# Altium PCB PCB2.PcbDoc
Units mm, origin at the board's own origin, x right, y up, seen from the top; angles counter-clockwise.
Board outline 73.79 x 93.34 mm, 2 copper layers (Top Layer, Bottom Layer); 58 components, 45 nets, 226 pads, 48 vias.
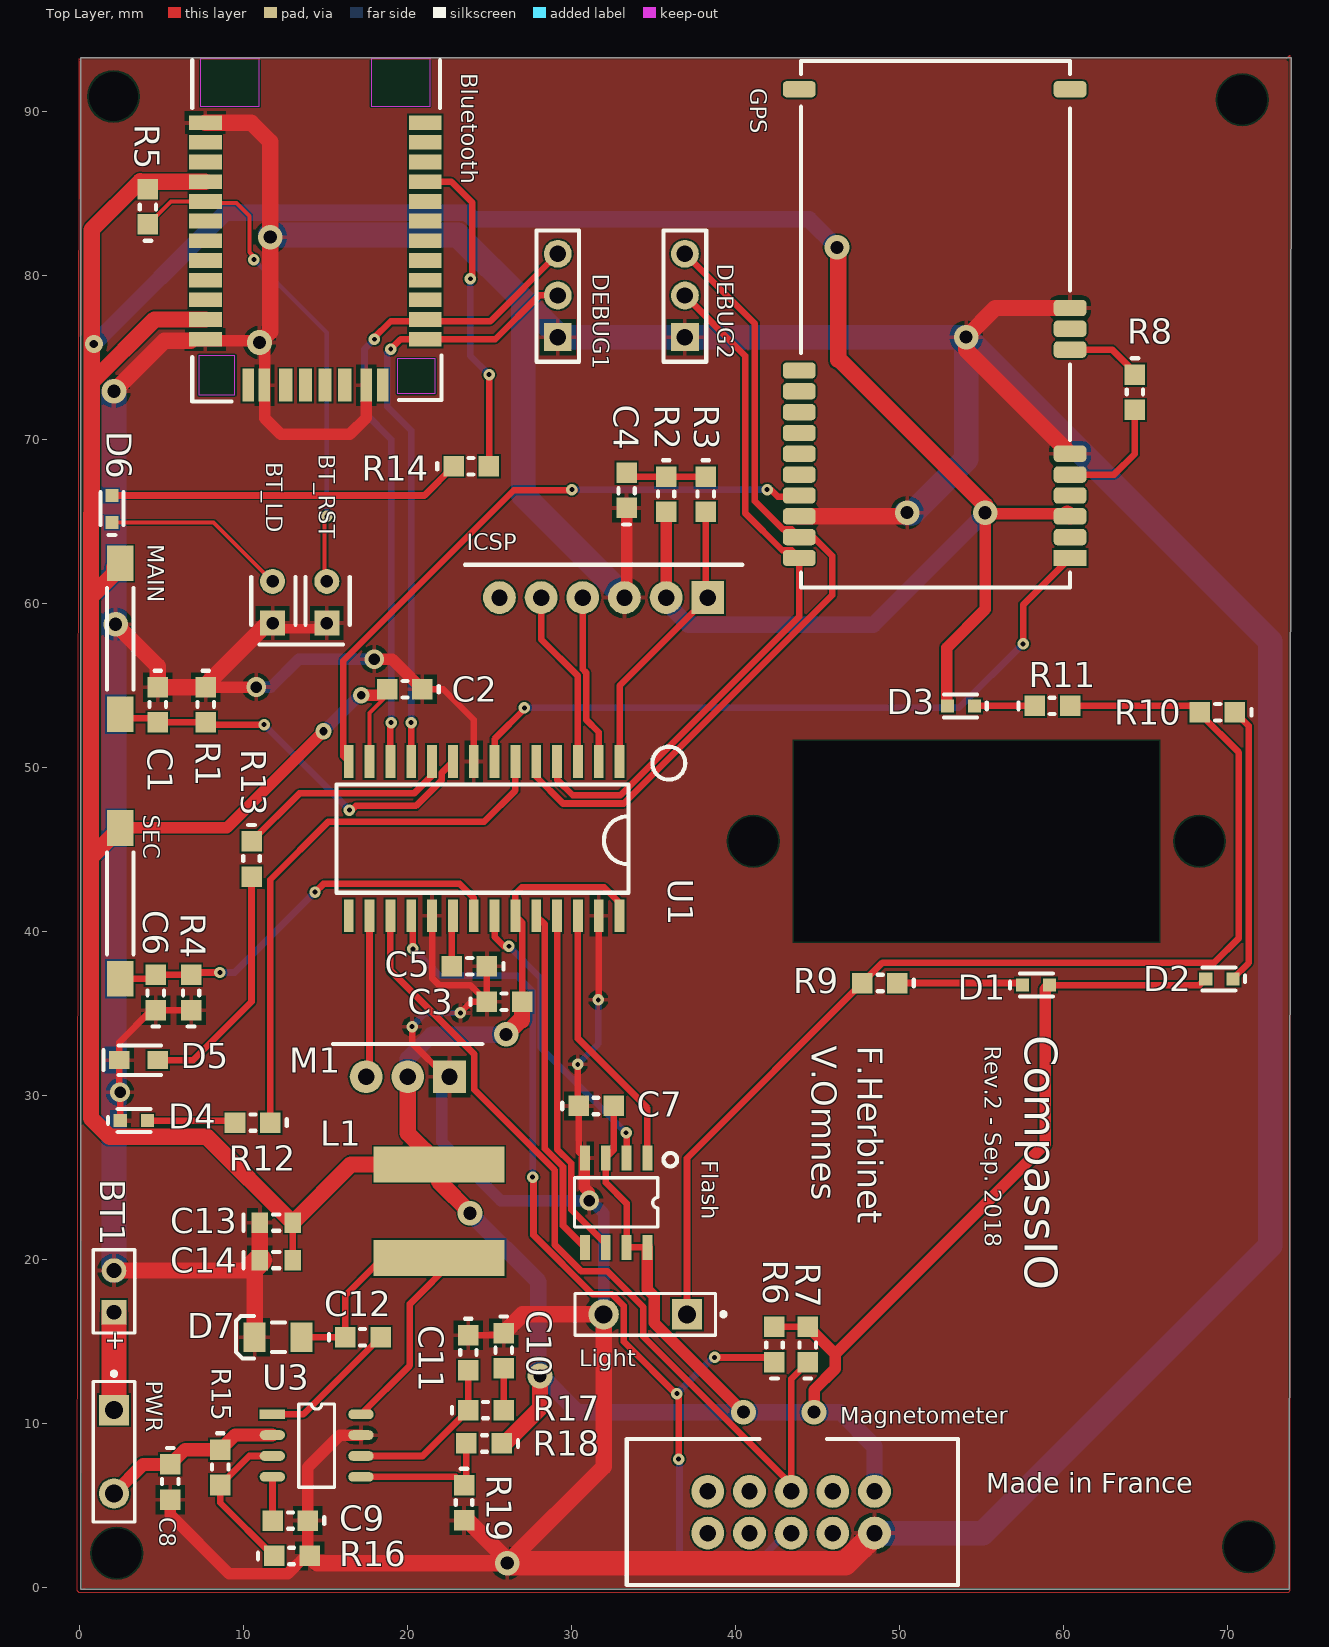
[diagram p0: Top Layer view]
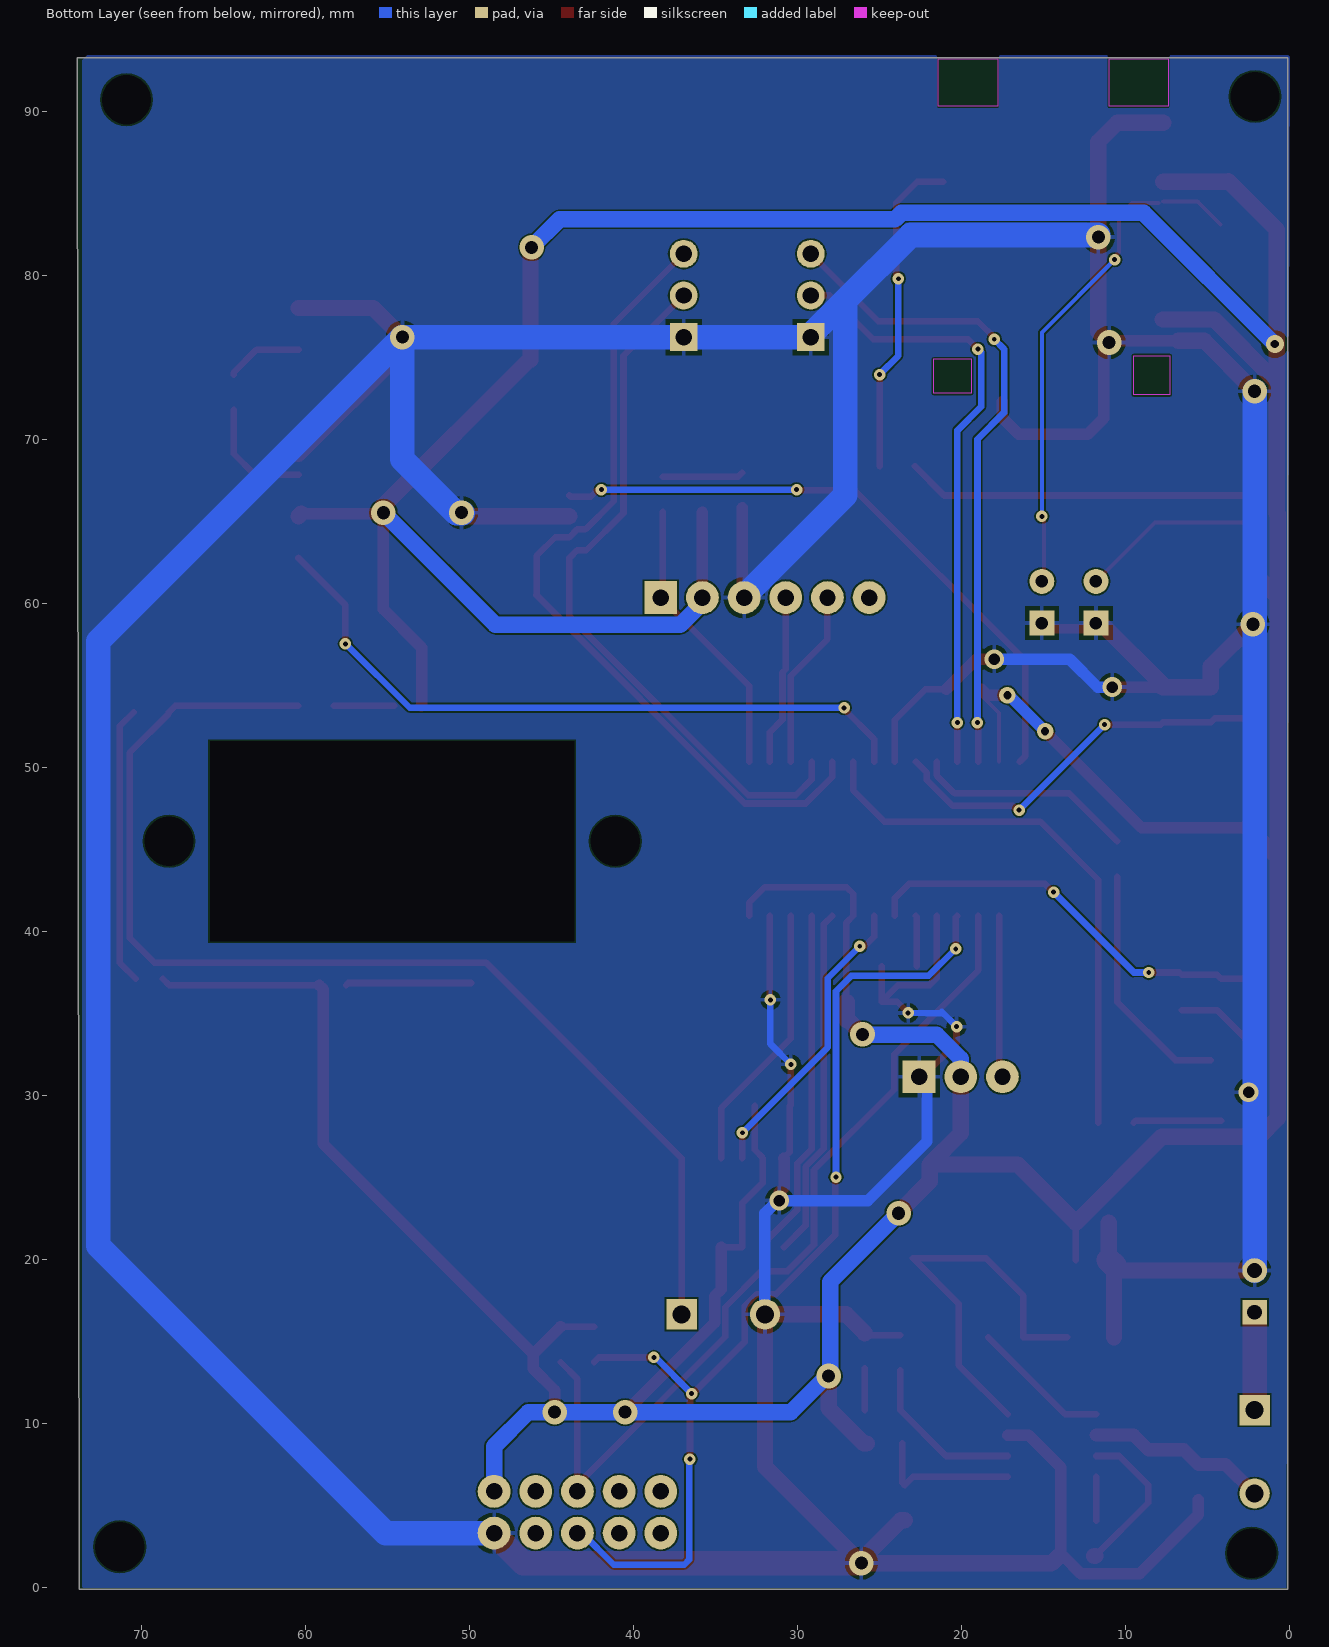
[diagram p1: Bottom Layer view, seen from below]

## Layer stack, top to bottom
Top Layer: signal copper 0.0356
Dielectric: dielectric 0.32, FR-4, Dk 4.8
Bottom Layer: signal copper 0.0356

## Board outline
0.1,-0.1 73.76,-0.1 73.887,93.245 0.1,93.245

## Design rules (kind name [scope] priority, off if disabled: settings)
Clearance [All] p1: gap=0.1
HoleSize [All] p1: absolutevalues=TRUE maxlimit=15 minlimit=0.1 maxpercent=80.000 minpercent=20.000
HoleToHoleClearance [All] p1: gap=0.2 allowstackedmicrovias=TRUE
MinimumSolderMaskSliver [All] p1: minsoldermaskwidth=0.05
PolygonConnect [All] p1: connectstyle=Relief reliefconductorwidth=0.254 reliefentries=4 polygonreliefangle="90 Angle" airgapwidth=0.254
RoutingVias [All] p1: holewidth=0.5 width=0.6 viastyle="Through Hole" minholewidth=0.1 minwidth=0.2 maxholewidth=1 maxwidth=2
SilkToSilkClearance [All] p1: silktosilkclearance=0.1
SilkToSolderMaskClearance [IsPad] p1: minsilkscreentomaskgap=0.1 clearancetoexposedcopper=TRUE
SolderMaskExpansion [All] p1: expansion=0.102
Width [All] p1: maxlimit=2.5 minlimit=0.1 preferedwidth=0.2
23 further rules are at their usual default settings.

## Classes and differential pairs
component class Bluetooth: Bluetooth BT_RST DEBUG1 R5
component class Flash: C7 Flash
component class GPS: DEBUG2 GPS R8
component class "LED RGB": BT_LD D1 D2 D3 D4 D5 D6 Light R9 R10 R11 R12 R13 R14
component class MOD-MAG: Magnetometer R6 R7
component class PIC32: C1 C2 C3 C4 C5 C6 ICSP MAIN R1 R2 R3 R4 SEC U1
component class POWER: BT1 C8 C9 C10 C11 C12 C13 C14 D7 L1 PWR R15 R16 R17 R18 R19 U3
component class ServoMotor: M1

## Components (designator, comment, footprint, x,y, rotation, side; value= is the part's Value field where it differs from the comment)
Bluetooth "RN42" RN42 7.7,89.3 r0 top (schematic designator J2)
BT1 "5-10V" BAT-2 2.132,18.061 r90 top
BT_LD "jumper" "jumper 254" 11.8,58.8 r90 top (schematic designator J7)
BT_RST "jumper" "jumper 254" 15.1,58.8 r90 top (schematic designator J1)
C1 "0.1uF" own_0603 4.799,54.891 r270 top
C2 "0.1µF" own_0603 20.928,54.764 r180 top
C3 "0.1µF" own_0603 24.865,35.714 r0 top
C4 "0.1µF" own_0603 33.374,65.813 r90 top
C5 "10µF" own_0603 24.865,37.873 r180 top
C6 "0.1uF" own_0603 4.672,35.206 r90 top
C7 "100nF" own_0603 30.453,29.364 r0 top
C8 "22uF" own_0603 5.561,7.52 r270 top
C9 "8.2nF" own_0603 13.943,4.091 r180 top
C10 "1.2nF" own_0603 25.89,15.521 r270 top
C11 "25pF" own_0603 23.731,15.394 r270 top
C12 "0.1uF" own_0603 16.229,15.267 r0 top
C13 "47uF" Own_0805 11.022,22.252 r0 top
C14 "47uF" Own_0805 11.022,19.966 r0 top
D1 "LED3" "1608 led" 59.155,36.73 r180 top
D2 "LED3" "1608 led" 68.68,37.111 r0 top
D3 "LED3" "1608 led" 52.932,53.748 r0 top
D4 "LED0" "1608 led" 4.164,28.475 r180 top
D5 "LED0" "20125 led" 4.799,32.158 r180 top
D6 "LED0" "1608 led" 2.005,66.575 r270 top
D7 "SS24FL" ShotkyCMS 13.562,15.267 r180 top
DEBUG1 "DEBUG1" DEBUG3 29.183,76.227 r90 top (schematic designator J3)
DEBUG2 "DEBUG1" DEBUG3 36.93,76.227 r90 top (schematic designator J6)
Flash "LE25U40CMD" LE25U40CMDTWG 34.644,26.189 r270 top (schematic designator U2)
GPS "A2035-H" A2035-H 60.298,62.765 r180 top (schematic designator J5)
ICSP "Program / Debug" "C-Grid III X6" 38.327,60.352 r180 top (schematic designator J0)
L1 "10uH" "Inductor CMS" 21.944,20.093 r90 top
Light "SW-SPST" SPST-2 34.517,16.664 r180 top (schematic designator S3)
M1 "SG90" "C-Grid III x3" 22.579,31.142 r180 top
Magnetometer "MAG3110 Breakout" "UEXT_MALE x10" 48.487,5.869 r270 top (schematic designator J4)
MAIN "SW-PB" "SWTCH 1" 2.513,53.24 r90 top (schematic designator S1)
PWR "SW-SPST" SPST-2 2.132,8.282 r270 top (schematic designator S4)
R1 "10K" own_0603 7.72,54.891 r270 top
R2 "10K" own_0603 35.787,67.718 r270 top
R3 "1K" own_0603 38.2,67.718 r270 top
R4 "10K" own_0603 6.831,35.206 r90 top
R5 "10K" own_0603 4.2,83.1 r90 top
R6 "2.4K" own_0603 42.391,13.743 r90 top
R7 "2.4K" own_0603 44.423,13.743 r90 top
R8 "10K" own_0603 64.362,73.941 r270 top
R9 "100" own_0603 49.884,36.857 r180 top
R10 "100" own_0603 70.458,53.367 r180 top
R11 "100" own_0603 58.266,53.748 r0 top
R12 "100" own_0603 11.657,28.348 r180 top
R13 "100" own_0603 10.514,45.493 r270 top
R14 "330" own_0603 22.833,68.353 r0 top
R15 "174K" own_0603 8.609,8.409 r270 top
R16 "133K" own_0603 11.911,1.932 r0 top
R17 "44.2K" own_0603 23.731,10.822 r0 top
R18 "10.2K" own_0603 25.763,8.79 r180 top
R19 "3.24K" own_0603 23.468,6.25 r270 top
SEC "SW-PB" "SWTCH 1" 2.513,37.111 r90 top (schematic designator S2)
U1 "PIC32MX250F128B" PIC32MX250F128/SO 33.247,49.557 r180 top
U3 "TPS54231D" R-PDSO-G8 11.784,10.568 r0 top

## Footprints (in the part's own frame and the unit in brackets; to place one, negate y for a bottom-side part, rotate by r counter-clockwise, add the part's x,y. Pads: shape width x height; smd on the part's side, far side on the other; paste and mask are expansions set on the pad)
"1608 led" [mm] "led fp"
  rect 0.8x0.8 smd: 1(0,0) 2(1.65,0)
  silkscreen extent -0.2,-0.7 2.4,0.7
"20125 led" [mm] "led fp"
  rect 1.25x1.1 smd: 1(0,0) 2(2.35,0)
  silkscreen extent -0.2,-0.9 3.3,0.9
A2035-H [mm]
  rect 2x1 smd: 1(-0.11,0)
  rrect50% 2x1 smd: 2(-0.11,-1.27) 3(-0.11,-2.54) 4(-0.11,-3.81) 5(-0.11,-5.08) 6(-0.11,-6.35) 7(-0.11,-12.7) 8(-0.11,-13.97) 9(-0.11,-15.24) 10(-0.11,-28.575) 11(16.4,-28.575) 12(16.4,-11.43) 13(16.4,-10.16) 14(16.4,-8.89) 15(16.4,-7.62) 16(16.4,-6.35) 17(16.4,-5.08) 18(16.4,-3.81) 19(16.4,-2.54) 20(16.4,-1.27) 21(16.4,0)
  silkscreen extent -0.1,-30.3 16.3,1.8
BAT-2 [mm] "Battery; 2 Leads"
  rect 1.5x1.5 hole 0.9: 1(-1.27,0)
  round 1.5 hole 0.9: 2(1.27,0)
  silkscreen extent -2.54,-1.27 2.54,1.27
"C-Grid III x3" [mm]
  rect 2x2 hole 1: 1(0,0)
  round 2 hole 1: 2(2.54,0) 3(5.08,0)
  silkscreen extent -2,-2 7.1,-2
"C-Grid III X6" [mm]
  rect 2x2 hole 1: 1(0,0)
  round 2 hole 1: 2(2.54,0) 3(5.08,0) 4(7.62,0) 5(10.16,0) 6(12.7,0)
  silkscreen extent -2.1,-2 14.8,-2
DEBUG3 [mm] "3 pin header footprint"
  rect 1.7x1.7 hole 1: 1(0,0)
  round 1.7 hole 1: 2(2.54,0) 3(5.08,0)
  silkscreen extent -1.5,-1.3 6.5,1.3
"Inductor CMS" [mm] "Power inductor footprint"
  rect 2.2x8 smd: 1(0,0) 2(5.7,0)
"jumper 254" [mil] "jumper 2"
  rect 60x60 hole 30: 1(0,0)
  round 60 hole 30: 2(100,0)
  silkscreen extent -4,-55 110,51
LE25U40CMDTWG [mm]
  rect 1.5x0.6 smd: 1(0,0) 2(0,-1.27) 3(0,-2.54) 4(0,-3.81) 5(5.45,-3.81) 6(5.45,-2.54) 7(5.45,-1.27) 8(5.45,0)
  silkscreen extent -0.31,-4.44 4.2,1.81
own_0603 [mm] "0603_fp"
  rect 1.25x1.25 smd: 1(0,0) 2(2.15,0)
  silkscreen extent -1,-0.5 1.2,0.5
Own_0805 [mm] "0805 footprint"
  rect 1x1.25 smd: 1(0,0) 2(2,0)
  silkscreen extent -1,-0.5 1.2,0.5
PIC32MX250F128/SO [mm]
  rect 0.6x2 smd: 1(0.3,-0.8) 2(1.57,-0.8) 3(2.84,-0.8) 4(4.11,-0.8) 5(5.38,-0.8) 6(6.65,-0.8) 7(7.92,-0.8) 8(9.19,-0.8) 9(10.46,-0.8) 10(11.73,-0.8) 11(13,-0.8) 12(14.27,-0.8) 13(15.54,-0.8) 14(16.81,-0.8) 15(16.81,8.6) 16(15.54,8.6) 17(14.27,8.6) 18(13,8.6) 19(11.73,8.6) 20(10.46,8.6) 21(9.19,8.6) 22(7.92,8.6) 23(6.65,8.6) 24(5.38,8.6) 25(4.11,8.6) 26(2.84,8.6) 27(1.57,8.6) 28(0.3,8.6)
  silkscreen extent -3.7,-1.7 17.55,7.2
R-PDSO-G8 [mm] "TPS54231"
  rect 1.55x0.6 smd: 1(0,0)
  oval 1.55x0.6 smd: 2(0,-1.27) 3(0,-2.54) 4(0,-3.81) 5(5.4,-3.81) 6(5.4,-2.54) 7(5.4,-1.27) 8(5.4,0)
  silkscreen extent 1.61,-4.44 3.79,0.64
RN42 [mm]
  rect 2x0.9 smd: 1(0,0) 2(0,-1.2) 3(0,-2.4) 4(0,-3.6) 5(0,-4.8) 6(0,-6) 7(0,-7.2) 8(0,-8.4) 9(0,-9.6) 10(0,-10.8) 11(0,-12) 12(0,-13.2) 13(13.4,-13.2) 14(13.4,-12) 15(13.4,-10.8) 16(13.4,-9.6) 17(13.4,-8.4) 18(13.4,-7.2) 19(13.4,-6) 20(13.4,-4.8) 21(13.4,-3.6) 22(13.4,-2.4) 23(13.4,-1.2) 24(13.4,0)
  rect 0.7x2 smd: 28(9.8,-16) 29(3.6,-16) 30(10.8,-16) 35(2.6,-16)
  rect 0.8x2 smd: 31(8.5,-16) 32(7.3,-16) 33(6.1,-16) 34(4.9,-16)
  Keep-Out Layer region: 10.1,1 13.7,1 13.7,3.9 10.1,3.9
  Keep-Out Layer region: -0.3,1 3.3,1 3.3,3.9 -0.3,3.9
  Keep-Out Layer region: 11.7,-16.5 14,-16.5 14,-14.4 11.7,-14.4
  Keep-Out Layer region: -0.4,-16.6 1.8,-16.6 1.8,-14.2 -0.4,-14.2
  silkscreen extent -0.8,-17 14.4,3.8
ShotkyCMS [mm] "ss24fl footprint"
  rect 1.34x1.8 smd: 1(0,0) 2(2.86,0)
  silkscreen extent 1,-1.3 4,1.3
SPST-2 [mm] "Switch; 2 Leads"
  rect 1.85x1.85 hole 1.1: 1(-2.54,0)
  round 1.85 hole 1.1: 2(2.54,0)
  silkscreen extent -4.89,-1.27 4.28,1.27
"SWTCH 1" [mm] "Switch cms footprint"
  rect 2.18x1.6 smd: 1(0,0) 2(9.2,0)
  silkscreen extent 1.5,-0.8 7.7,0.8
"UEXT_MALE x10" [mm]
  round 2 hole 1: 1(0,0) 2(2.54,0) 3(0,-2.54) 4(2.54,-2.54) 5(0,-5.08) 6(2.54,-5.08) 7(0,-7.62) 8(2.54,-7.62) 9(0,-10.16) 10(2.54,-10.16)
  silkscreen extent -3.2,-15.1 5.7,5.1

## Part data
Bluetooth: "Bluetooth Module"
BT1: library part Battery, "4xAA"
BT_LD BT_RST: "Jumper"
C1 C2 C3 C4 C5 C6 C7 C8 C9 C10 C11 C12 C13 C14: library part Cap, "Capacitor"
D1 D2 D3: "Typical BLUE SiC LED"
D4 D5 D6: "Typical INFRARED GaAs LED"
D7: library part "Diode 10TQ035", "Schottky Rectifier"
DEBUG1 DEBUG2: library part TTL_Debug_3, "Debug interface"
Flash: "Flash memory"
GPS: "GPS Module"
ICSP: library part ICSP
L1: library part Inductor, "Inductor"
Light PWR: "Single-Pole, Single-Throw Switch"
M1: "Servo motor"
Magnetometer: library part MOD-MAG3110
MAIN SEC: "Switch"
R1 R2 R3 R4 R5 R6 R7 R8 R9 R10 R11 R12 R13 R14 R15 R16 R17 R18 R19: library part Res1, "Resistor"
U1: "Microcontrolleur"
U3: "Buck SD 3.3V"

## Free pads (board coordinates)
  rect 0x0 hole 12.2 square: 19(49.7,45.5) 19(59.7,45.5)
  round 0 hole 3: 20(2.1,90.9) 20(2.3,2.1) 20(41.1,45.5) 20(68.3,45.5) 20(70.9,90.7) 20(71.3,2.5)

## Via types
v1: diameter 0.7, hole 0.3, Top Layer to Bottom Layer, 27 vias
v2: diameter 1.5, hole 0.8, Top Layer to Bottom Layer, 14 vias
v3: diameter 1.2, hole 0.7, Top Layer to Bottom Layer, 4 vias
v4: diameter 1, hole 0.5, Top Layer to Bottom Layer, 2 vias
v5: diameter 1.1, hole 0.5, Top Layer to Bottom Layer, 1 vias

## Nets (pads, with @x,y where several pads share a name; then routed paths per layer and width w, separated by ;. In a path a pad name is that pad's centre, name@x,y a point inside that pad or via, vN(x,y) a via of type N, cw(c..) or ccw(c..) an arc to the next point about the centre after c; other vN are vias at no path point)
GND: Bluetooth.1 Bluetooth.12 Bluetooth.28 Bluetooth.29 BT1.2 BT_LD.1 BT_RST.1 C1.1 C2.1 C3.1 C4.1 C5.1 C6.1 C7.1 C8.2 C9.1 C10.1 C11.1 C13.1 C14.1 D4.2 D5.2 D7.2 DEBUG1.1 DEBUG2.1 Flash.4 GPS.6 GPS.9 GPS.19 ICSP.3 Light.2 M1.1 Magnetometer.2 R1.1 R4.1 R16.2 R19.2 U1.8 U1.19 U1.27 U3.7 | length 505.8
  Top Layer w0.4: D4.2 2.5,28.489 v3(2.5,30.2) 2.449,30.251 D5.2 2.449,33.237 4.418,35.206 R4.1@6.577,35.206 ; R1.1 R1.1@7.72,55.018 ; v1(20.3,34.2) 20.3,33.2 22.358,31.142 M1.1 ; C2.1 22.198,54.764 24.057,52.905 U1.8 ; U1.19 21.517,37.157 21.944,36.73 23.849,36.73 C3.1 ; v1@23.3,35.1 23.914,35.714 C3.1 ; C11.1 25.763,15.394 C10.1 ; C5.1 C3.1 ; v1(30.4,31.9) 30.4,29.417 C7.1 30.453,26.57 Flash.4 ; U1.27 31.677,35.923 v1@31.7,35.9
  Top Layer w0.6: BT_LD.1@12.066,58.8 12.419,58.447 14.424,58.447 BT_RST.1@15.086,59.109
  Top Layer w0.7: C8.2 5.561,4.439 9.143,0.857 12.722,0.857 13.797,1.932 R16.2 13.943,2.05 C9.1 13.943,7.343 15.898,9.298 U3.7 ; Bluetooth.12@6.796,76 v2@11.1,76 ; R1.1@7.729,54.9 v3(10.8,54.9) ; v2(11,75.9) 11,76 11.32,76.32 11.32,71.28 12.3,70.3 16.5,70.3 17.52,71.32 17.52,72.292 ; v3(18,56.6) 19.092,56.6 C2.1 ; Flash.4 30.8,26.155 30.8,24.4 31.1,24.1 v3(31.1,23.6) ; ICSP.3@33.374,60.479 C4.1
  Top Layer w1: BT1.2 10.387,19.331 10.702,19.646 D7.2 ; v2(2.132,72.925) 5.207,76 Bluetooth.12@6.796,76 ; v2(2.232,58.725) 4.799,56.158 C1.1 R1.1 ; Bluetooth.1 10.5,89.3 11.657,88.143 v2(11.657,82.323) 11.657,76.557 v2@11.1,76 ; R1.1@7.72,55.018 11.502,58.8 BT_LD.1@12.066,58.8 ; C14.1 C13.1 ; R16.2 14.514,1.479 26.321,1.479 v2@26.2,1.6 ; R19.2 23.7,4.1 v2@26.2,1.6 ; C10.1 27.033,16.664 Light.2 31.977,7.377 v2@26.2,1.6 ; v2(26.1,1.5) v2@26.2,1.6 ; GPS.19 50.253,65.305 v2(50.475,65.527) ; GPS.6 54.075,75.448 v2(54.075,76.227) 55.853,78.005 GPS.9
  Top Layer w1.5: C14.1@10.702,19.646 C14.1 ; v2@26.321,1.479 46.713,1.479 48.487,3.253 Magnetometer.2 ; ICSP.3 ICSP.3@33.374,60.479
  Bottom Layer w0.4: v1(20.3,34.2) 21.2,35.1 ; 21.1,35 v1(23.247,35.032) ; v1(30.4,31.9) 31.647,33.147 v1(31.647,35.832)
  Bottom Layer w0.7: v3(10.8,54.9) 11.7,54.9 13.4,56.6 v3(18,56.6) ; M1.1 22.1,30.663 22.1,27.2 25.7,23.6 v3(31.1,23.6) ; v3@31.15,23.65 31.977,22.823 Light.2
  Bottom Layer w1.5: BT1.2 v2(2.132,72.925) ; v2@11.657,82.45 23.096,82.45 27.073,78.473 ; ICSP.3 33.247,60.428 27.073,66.602 27.073,78.473 ; Magnetometer.2 55.091,3.329 72.617,20.855 72.617,57.685 v2(54.075,76.227) ; v2@50.4,65.5 50.8,65.5 54.075,68.775 v2(54.075,76.227) ; 27.073,78.473 29.183,76.363 DEBUG1.1 DEBUG2.1 v2(54.075,76.227)
"MAIN BUTTON": C6.2 R4.2 SEC.1 U1.21 | length 25.7
  Top Layer w0.4: SEC.1@2.132,37.111 4.173,37.111 4.418,37.356 C6.2 6.577,37.356 6.719,37.498 v1(8.583,37.498) ; v1@14.4,42.4 14.9,42.9 23.2,42.9 24.057,42.043 U1.21
  Bottom Layer w0.4: v1@8.6,37.5 9.485,37.5 v1(14.383,42.398)
MCLR: ICSP.1 R3.2 U1.1 | length 17.5
  Top Layer w0.4: U1.1 32.947,54.972 ICSP.1 ; ICSP.1@38.2,60.479 R3.2
  Top Layer w1.5: ICSP.1@38.2,60.479 ICSP.1
NetBT1_1: BT1.1 PWR.1 | length 6
  Top Layer w1.5: PWR.1 BT1.1
NetC4_2: C4.2 R2.1 R3.1 | length 4.9
  Top Layer w0.4: C4.2 33.619,67.718 R2.1 R3.1
NetC5_2: C5.2 U1.20 | length 3.1
  Top Layer w0.4: C5.2 22.715,40.885 U1.20
NetC8_1: C8.1 PWR.2 R15.1 U3.2 | length 11.4
  Top Layer w0.8: PWR.2@2.386,5.742 PWR.2 3.91,7.52 C8.1 6.45,8.409 R15.1 9.498,9.298 U3.2
NetC9_2: C9.2 U3.4 | length 2.7
  Top Layer w0.4: U3.4 11.793,6.749 C9.2
NetC10_2: C10.2 R17.2 | length 2.6
  Top Layer w0.4: R17.2 25.89,10.831 C10.2
NetC11_2: C11.2 R17.1 U3.6 | length 10.1
  Top Layer w0.4: U3.6 20.937,8.028 R17.1 C11.2
NetC12_1: C12.1 D7.1 L1.1 U3.8 | length 24.8
  Top Layer w0.4: D7.1 C12.1 16.229,17.807 18.515,20.093 22.96,20.093 20.166,17.299 20.166,13.55 U3.8
NetC12_2: C12.2 U3.1 | length 8.5
  Top Layer w0.4: U3.1 13.68,10.568 C12.2
NetD1_2: D1.2 R9.1 | length 7.7
  Top Layer w0.4: R9.1 57.378,36.857 D1.2
NetD2_2: D2.2 R10.1 | length 17
  Top Layer w0.4: D2.2 71.3,38.081 71.3,52.525 R10.1
NetD3_2: D3.2 R11.1 | length 3.7
  Top Layer w0.4: D3.2 R11.1
NetD4_1: D4.1 R12.2 | length 5.4
  Top Layer w0.4: D4.1 9.38,28.475 R12.2
NetD5_1: D5.1 R13.2 | length 14.8
  Top Layer w0.4: D5.1 6.958,32.158 10.514,35.714 R13.2
NetD6_1: D6.1 R14.1 | length 21.6
  Top Layer w0.4: D6.1 21.055,66.575 R14.1
NetD6_2: BT_LD.2 D6.2 | length 11.1
  Top Layer w0.254: D6.2 8.199,64.925 BT_LD.2@11.643,61.481
NetJ1_2: Bluetooth.5 BT_RST.2 R5.1 | length 30.8
  Top Layer w0.254: R5.1 5.6,84.5 Bluetooth.5 ; Bluetooth.5@8,84.4 9.6,84.4 10.4,83.6 10.4,81.4 v1@10.8,81 ; BT_RST.2@14.961,61.649 14.961,65.161 v1(15.1,65.3)
  Bottom Layer w0.254: v1(10.661,80.946) 15.1,76.507 v1(15.1,65.3)
NetJ2_13: Bluetooth.13 DEBUG1.2 U1.11 | length 37.4
  Top Layer w0.4: v1(19,75.5) 19.6,76.1 Bluetooth.13 25.373,76.1 28.04,78.767 DEBUG1.2 ; U1.11 v1(20.247,52.732)
  Bottom Layer w0.4: v1(19,75.5) 18.8,75.3 18.8,71.988 20.247,70.541 v1(20.247,52.732)
NetJ2_14: Bluetooth.14 DEBUG1.3 U1.12 | length 39.8
  Top Layer w0.4: v1@17.953,76.154 19,77.2 25.076,77.2 DEBUG1.3 ; U1.12 18.977,52.432 v1@19.023,52.478
  Bottom Layer w0.4: v1(18,76.1) 17.4,75.5 17.4,71.627 19.023,70.004 v1(19.023,52.732)
NetJ2_21: Bluetooth.21 R14.2 | length 20
  Top Layer w0.4: Bluetooth.21@21.12,85.7 22.7,85.7 23.976,84.424 23.976,79.91 v1(23.849,79.783) ; R14.2 24.992,68.362 v1(24.992,73.941)
  Bottom Layer w0.4: v1(23.849,79.783) 23.849,75.084 v1(24.992,73.941)
NetJ4_5: Magnetometer.5 R7.1 U1.17 | length 54.4
  Top Layer w0.4: U1.17 18.977,37.623 24.1,32.5 24.1,30.353 29,25.453 28.989,25.442 28.989,20.911 30.6,19.3 32.2,19.3 34.4,17.1 34.4,15.3 43.407,6.293 Magnetometer.5 43.407,12.727 R7.1
NetJ4_6: Magnetometer.6 R6.1 U1.18 | length 64.1
  Top Layer w0.4: U1.18 20.347,40.857 v1(20.347,38.932) ; v1@27.7,25 27.7,21.493 31.304,17.889 32.484,17.889 33.202,17.171 33.202,14.998 36.547,11.653 v1(36.547,7.832) ; v1(38.747,14.032) 42.102,14.032 R6.1
  Bottom Layer w0.4: v1@20.35,38.95 22,37.3 26.7,37.3 27.647,36.353 v1(27.647,25.032) ; v1(36.447,11.832) 38.7,14.085 v1@38.7,14.1 ; v1@36.6,7.8 36.6,1.7 36.9,1.4 41.2,1.4 43.129,3.329 Magnetometer.6
NetJ5_1: GPS.1 U1.7 | length 42.4
  Top Layer w0.4: U1.7 25.327,51.727 v1@27.2,53.6 ; v1(57.547,57.532) 57.547,59.904 GPS.1
  Bottom Layer w0.4: v1(27.147,53.632) 53.632,53.632 v1@57.5,57.5
NetJ5_5: GPS.5 R8.2 | length 7.2
  Top Layer w0.4: GPS.5 63.092,67.845 64.362,69.115 R8.2
NetJ5_7: GPS.7 R8.1 | length 4.7
  Top Layer w0.4: GPS.7 62.965,75.465 64.362,74.068 R8.1
NetJ5_18: GPS.18 U1.14 | length 38.7
  Top Layer w0.4: U1.14 16.1,50.694 16.1,56.5 26.5,66.9 v1@30.2,66.9 ; v1(41.947,66.932) 42.168,66.932 42.6,66.5 43.823,66.5 GPS.18
  Bottom Layer w0.4: v1(30.047,66.932) 41.868,66.932 v1@41.9,66.9
NetJ5_20: DEBUG2.3 GPS.20 U1.5 | length 50.2
  Top Layer w0.4: U1.5 27.867,49.433 29.5,47.8 33.207,47.8 45.907,60.5 45.9,60.5 45.9,62.9 44.765,64.035 GPS.20 43.428,64.505 42.92,64.505 41.2,66.225 41.2,77.037 DEBUG2.3
NetJ5_21: DEBUG2.2 GPS.21 U1.4 | length 43.6
  Top Layer w0.4: U1.4 29.137,49.263 30.1,48.3 33,48.3 43.898,59.198 GPS.21 43.428,63.235 42.865,63.235 40.6,65.5 40.6,75.097 DEBUG2.2
NetM1_3: M1.3 U1.16 | length 9.6
  Top Layer w0.4: M1.3@17.707,31.35 U1.16
NetR9_2: Light.1 R9.2 R10.2 R11.2 | length 71.5
  Top Layer w0.4: Light.1 37.057,26.18 R9.2 48.977,38.1 69.2,38.1 70.7,39.6 70.7,50.9 68.308,53.292 R10.2 67.927,53.748 R11.2
NetR12_1: R12.1 U1.6 | length 33.8
  Top Layer w0.4: R12.1 11.657,43.157 15.2,46.7 24.7,46.7 26.597,48.597 U1.6
NetR13_1: R13.1 U1.10 | length 13.5
  Top Layer w0.4: R13.1 13.435,48.414 20.42,48.414 21.517,49.511 U1.10
NetR15_2: R15.2 R16.1 U3.3 | length 9.6
  Top Layer w0.4: U3.3 10.378,8.028 R15.2 8.609,5.176 R16.1@11.853,1.932
  Top Layer w1: R16.1@11.853,1.932 R16.1
NetR18_2: R18.2 R19.1 U3.5 | length 9.1
  Top Layer w0.4: U3.5 22.96,6.758 R19.1 23.613,6.395 R18.2
NetU1_22: Flash.2 U1.22 | length 18.4
  Top Layer w0.4: U1.22 25.327,39.673 25.9,39.1 v1(26.2,39.1) ; Flash.2 33.374,27.774 v1@33.4,27.8
  Bottom Layer w0.4: v1@26.143,39.157 28.147,37.153 28.147,32.932 v1(33.347,27.732)
NetU1_24: Flash.5 U1.24 | length 21.4
  Top Layer w0.4: U1.24 28.4,40.424 28.4,26.76 29.5,25.66 29.5,22.073 Flash.5
NetU1_25: Flash.6 U1.25 | length 21.4
  Top Layer w0.4: U1.25 29.137,26.73 30,25.867 30,23.047 32.104,20.943 Flash.6
NetU1_26: Flash.1 U1.26 | length 16.5
  Top Layer w0.4: U1.26 30.407,33.474 34.644,29.237 Flash.1
PGEC: ICSP.5 U1.3 | length 10.9
  Top Layer w0.4: ICSP.5 28.167,57.812 30.407,55.572 U1.3
PGED: ICSP.4 U1.2 | length 10.4
  Top Layer w0.4: ICSP.4 30.707,55.979 30.907,55.779 30.907,52.913 31.677,52.143 U1.2
"SECONDARY BUT": C1.2 MAIN.1 R1.2 U1.9 | length 24.5
  Top Layer w0.4: MAIN.1@2.132,52.986 4.554,52.986 C1.2 R1.2 7.856,52.605 v1(11.276,52.605) ; v1@16.61,47.398 16.864,47.652 20.536,47.652 22.117,49.233 22.117,49.687 U1.9
  Bottom Layer w0.4: v1@11.149,52.605 v1(11.276,52.605) v1(16.483,47.398)
V3P3: Bluetooth.4 Bluetooth.11 C2.2 C3.2 C7.2 C13.2 C14.2 D1.1 D2.1 D3.1 Flash.3 Flash.7 Flash.8 GPS.3 ICSP.2 L1.2 M1.2 Magnetometer.1 MAIN.2 R2.2 R5.2 R6.2 R7.2 R18.1 SEC.2 U1.13 U1.23 U1.28 | length 388.8
  Top Layer w0.254: U1.13 17.707,53.321 18.778,54.392 C2.2
  Top Layer w0.4: C14.2 C13.2 ; C3.2 27.015,40.539 U1.23 26.6,40.96 26.6,42.3 27,42.7 32,42.7 32.947,41.753 U1.28 ; C7.2 32.603,26.688 Flash.3 32.104,24.696 33.374,23.426 Flash.7 Flash.8 ; R6.2 R7.2 ; D1.1 68.299,36.73 D2.1
  Top Layer w0.7: SEC.2 9.011,46.311 v4(14.9,52.2) ; v4(17.2,54.4) 18.414,54.4 C2.2 ; Flash.8 34.644,18.181 35.05,17.775 35.05,16.15 v2(40.5,10.7) ; ICSP.2 R2.2 ; R7.2 44.457,15.893 46.1,14.25 ; v2(44.8,10.7) 44.8,12.05 46.1,13.35 46.1,14.25 ; D3.1 52.9,53.78 52.9,57.3 55.232,59.632 v2(55.232,65.525) v2@55.232,65.968 ; v2@55.282,65.475 GPS.3@60.238,65.475 ; D1.1 58.9,36.475 58.9,27.05 46.1,14.25
  Top Layer w1: 0.732,65.45 0.732,60.4 ; 0.782,65.45 0.782,73.484 ; MAIN.2@2.132,62.186 2.132,61.8 0.732,60.4 ; SEC.2 0.732,44.53 ; Bluetooth.4 3.75,85.7 3.725,85.725 0.782,82.782 0.782,73.484 ; Bluetooth.11@7.72,77.3 4.598,77.3 0.782,73.484 ; M1.2 20.039,27.698 L1.2 ; v2@23.9,22.8 21.944,24.756 L1.2 ; R18.1 25.948,8.79 28.1,10.942 v2(28.1,12.9) ; v2(26.032,33.725) 26.907,34.6 27,34.6 27,35.699 C3.2 ; 46.268,74.832 v2@46.268,81.568 ; 46.318,74.882 v2@55.232,65.968 ; v2(55.232,65.525) v2@55.282,65.475 ; GPS.3@60.238,65.475 GPS.3 ; 0.732,44.53 0.732,28.608 1.865,27.475 7.799,27.475 C13.2 16.563,25.793 L1.2 ; 0.732,44.53 0.732,60.4
  Bottom Layer w0.7: v4(14.9,52.2) v4@17.1,54.4
  Bottom Layer w1: v5(0.9,75.8) 8.9,83.8 23.655,83.8 24.055,83.4 44.5,83.4 v2(46.2,81.7) ; M1.2 20.039,32.239 21.5,33.7 v2@25.9,33.7 ; v2(23.832,22.825) 28,18.657 28,13.1 30.4,10.7 v2(40.5,10.7) v2(44.8,10.7) 46.4,10.7 48.487,8.613 Magnetometer.1 ; ICSP.2 35.787,60.043 37.13,58.7 48.407,58.7 v2(55.232,65.525)
pads on no net: Bluetooth.2 Bluetooth.3 Bluetooth.6 Bluetooth.7 Bluetooth.8 Bluetooth.9 Bluetooth.10 Bluetooth.15 Bluetooth.16 Bluetooth.17 Bluetooth.18 Bluetooth.19 Bluetooth.20 Bluetooth.22 Bluetooth.23 Bluetooth.24 Bluetooth.30 Bluetooth.31 Bluetooth.32 Bluetooth.33 Bluetooth.34 Bluetooth.35 GPS.2 GPS.4 GPS.8 GPS.10 GPS.11 GPS.12 GPS.13 GPS.14 GPS.15 GPS.16 GPS.17 ICSP.6 Magnetometer.3 Magnetometer.4 Magnetometer.7 Magnetometer.8 Magnetometer.9 Magnetometer.10 U1.15

## Polygon pours and split planes (outlines as drawn)
GND on Top Layer "Top Layer-No Net" (solid, shelved, pour order 6): 0,93.2 73.6,93.2 73.8,93.4 73.8,-0.2 73.7,-0.3 0,-0.3 -0.1,-0.2
GND on Top Layer "Top Layer-No Net" (solid, pour order 8): 0,93.1 73.6,93.1 73.7,93 73.7,0.2 73.9,0 0.4,0 0.2,-0.2
GND on Bottom Layer "Top Layer-No Net" (solid, pour order 10): 0,93.4 73.3,93.4 73.6,93.1 73.6,0.1 74.1,-0.4 73.7,0 0.2,0

## Silkscreen, mask and mechanical layers (free items; w line width, h text height)
Top Overlay:
  lines w0.254: 11,57.5 16.1,57.5
  text "CompassIO" at 57.631,33.682 h2 r270
  text "V.Omnes" at 44.677,33.047 h1.52 r270
  text "F.Herbinet" at 47.471,33.047 h1.52 r270
  text "Rev.2 - Sep. 2018" at 55.218,33.047 h1 r270
  text "Made in France" at 55.3,5.8 h1.2
Drill Drawing:
  circle w0.025: c95.465,11.808 r0.381
  circle w0.025: c95.465,11.808 r0.635
  circle w0.025: c95.465,7.998 r0.635
  lines w0.025: 94.83,3.871 95.148,3.871 95.148,3.553 95.783,3.553 95.783,3.871 96.1,3.871 96.1,4.506 95.783,4.506 95.783,4.823 95.148,4.823 95.148,4.506 94.83,4.506 94.83,3.871 ; 94.83,15.301 95.148,15.301 95.465,14.983 95.783,15.301 96.1,15.301 95.783,15.618 96.1,15.936 95.783,15.936 95.465,16.253 95.148,15.936 94.83,15.936 95.148,15.618 94.83,15.301 ; 94.83,20.063 96.1,20.063 95.465,18.793 94.83,20.063 ; 94.83,22.603 96.1,22.603 96.1,23.873 94.83,23.873 94.83,22.603 ; 94.83,27.048 95.465,26.413 96.1,27.048 95.465,27.683 94.83,27.048 ; 94.83,30.223 94.83,30.541 95.148,30.858 94.83,31.176 94.83,31.493 95.148,31.493 95.465,31.176 95.783,31.493 96.1,31.493 96.1,31.176 95.783,30.858 96.1,30.541 96.1,30.223 95.783,30.223 95.465,30.541 95.148,30.223 94.83,30.223 ; 94.83,34.033 95.465,34.351 96.1,34.033 95.783,34.668 96.1,35.303 95.465,34.986 94.83,35.303 95.148,34.668 94.83,34.033 ; 94.83,37.843 96.1,37.843 96.1,39.113 94.83,39.113 94.83,37.843 ; 95.084,22.857 95.846,22.857 95.846,23.619 95.084,23.619 95.084,22.857
  lines w0.381: 93.1,2.41 191.626,2.41 ; 93.1,40.51 191.626,40.51 ; 107.092,-1.4 107.092,44.32 ; 124.817,-1.4 124.817,44.32 ; 158.995,-1.4 158.995,44.32 ; 171.844,-1.4 171.844,44.32 ; 93.1,-1.4 191.626,-1.4 191.626,44.32 93.1,44.32 93.1,-1.4
  text "Symbol" at 95.386,41.653 h1.83
  text "Hit Count" at 108.235,41.653 h1.83
  text "Finished Hole Size" at 125.96,41.653 h1.83
  text "Plated" at 160.138,41.653 h1.83
  text "Hole Type" at 172.987,41.653 h1.83
  text "2" at 108.235,37.843 h1.52
  text "0,900mm (35,43mil)" at 125.96,37.843 h1.52
  text "PTH" at 160.138,37.843 h1.52
  text "Round" at 172.987,37.843 h1.52
  text "2" at 108.235,34.033 h1.52
  text "12,200mm (480,32mil)" at 125.96,34.033 h1.52
  text "PTH" at 160.138,34.033 h1.52
  text "Square" at 172.987,34.033 h1.52
  text "3" at 108.235,30.223 h1.52
  text "0,500mm (19,69mil)" at 125.96,30.223 h1.52
  text "PTH" at 160.138,30.223 h1.52
  text "Round" at 172.987,30.223 h1.52
  text "4" at 108.235,26.413 h1.52
  text "0,700mm (27,56mil)" at 125.96,26.413 h1.52
  text "PTH" at 160.138,26.413 h1.52
  text "Round" at 172.987,26.413 h1.52
  text "4" at 108.235,22.603 h1.52
  text "0,762mm (30,00mil)" at 125.96,22.603 h1.52
  text "PTH" at 160.138,22.603 h1.52
  text "Round" at 172.987,22.603 h1.52
  text "4" at 108.235,18.793 h1.52
  text "1,100mm (43,31mil)" at 125.96,18.793 h1.52
  text "PTH" at 160.138,18.793 h1.52
  text "Round" at 172.987,18.793 h1.52
  text "6" at 108.235,14.983 h1.52
  text "3,000mm (118,11mil)" at 125.96,14.983 h1.52
  text "PTH" at 160.138,14.983 h1.52
  text "Round" at 172.987,14.983 h1.52
  text "14" at 108.235,11.173 h1.52
  text "0,800mm (31,50mil)" at 125.96,11.173 h1.52
  text "PTH" at 160.138,11.173 h1.52
  text "Round" at 172.987,11.173 h1.52
  text "25" at 108.235,7.363 h1.52
  text "1,000mm (39,37mil)" at 125.96,7.363 h1.52
  text "PTH" at 160.138,7.363 h1.52
  text "Round" at 172.987,7.363 h1.52
  text "27" at 108.235,3.553 h1.52
  text "0,300mm (11,81mil)" at 125.96,3.553 h1.52
  text "PTH" at 160.138,3.553 h1.52
  text "Round" at 172.987,3.553 h1.52
  text "91 Total" at 108.235,-0.257 h1.52

## Dimensions
-2.7,93.3 to -0.7,-0.2 on Drill Drawing
73.6,-0.9 to 0.2,-0.8 on Drill Drawing

## Text inside footprints (layer, text, board x,y; h text height)
BT1: Top Overlay "+" at 2.709,14.391 h1.15 r90